# Altium PCB PCB4-SmallVersion.PcbDoc
Units mil, origin at the board's own origin, x right, y up, seen from the top; angles counter-clockwise.
Board outline 2065.03 x 1140.03 mil, 2 copper layers (Top Layer, Bottom Layer); 22 components, 19 nets, 79 pads, 16 vias.
Unrouted connection lines stored in the file: 4.
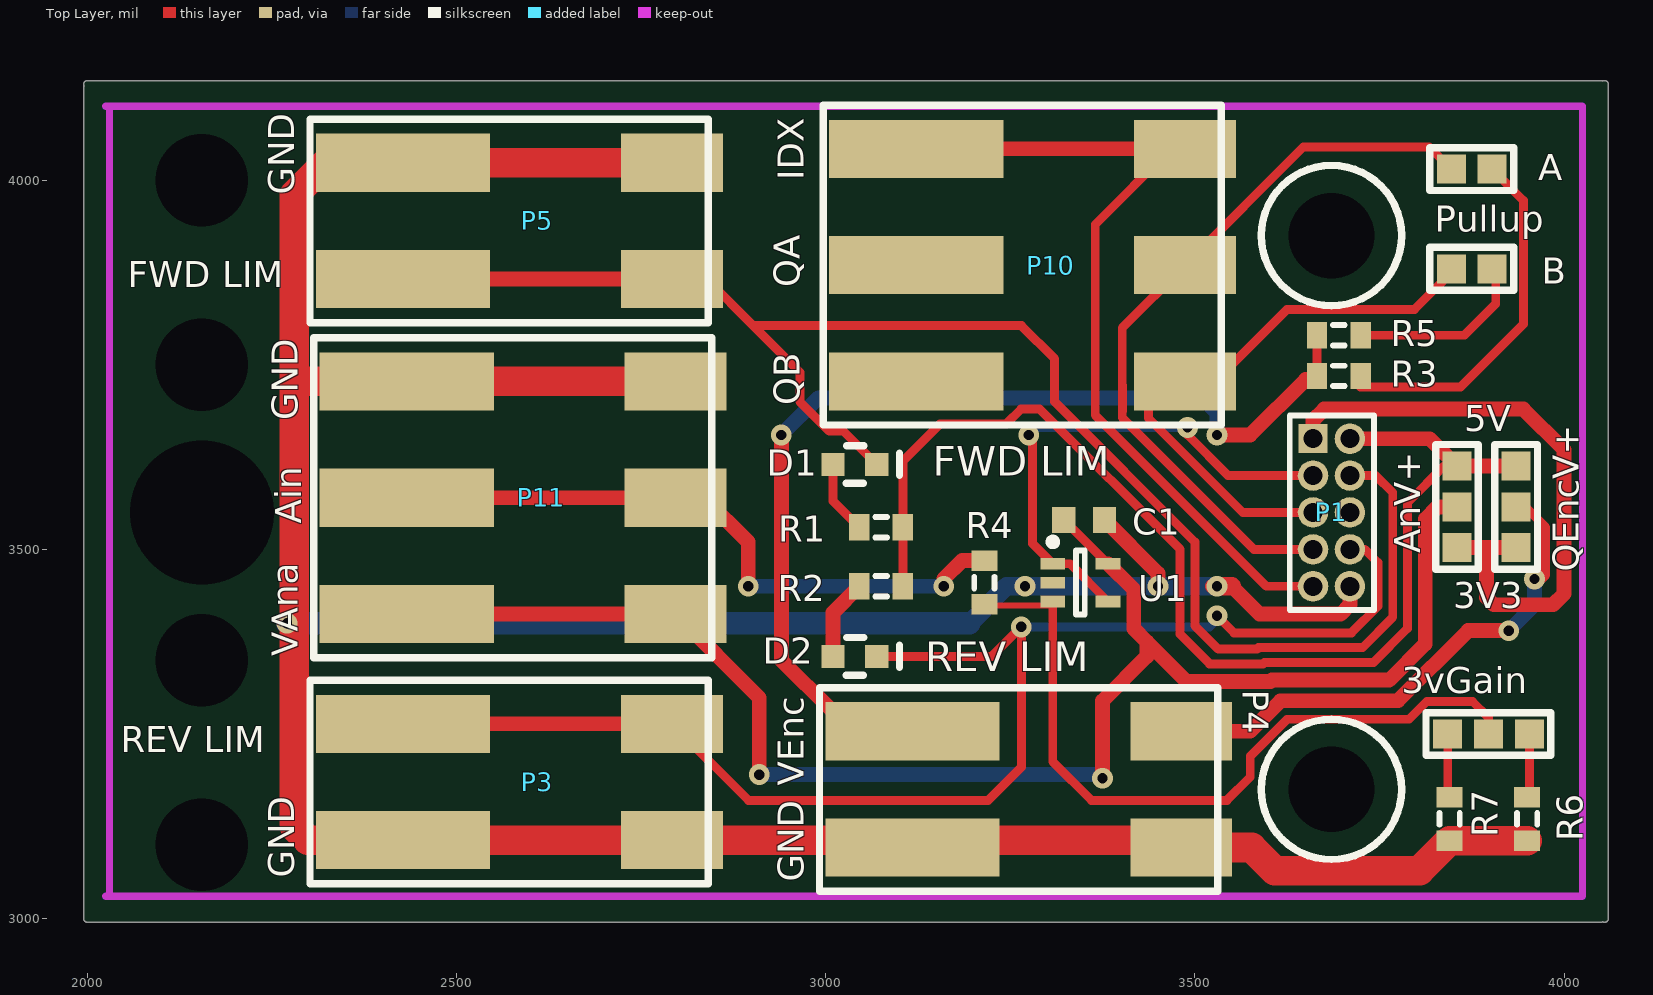
[diagram p0: Top Layer view]
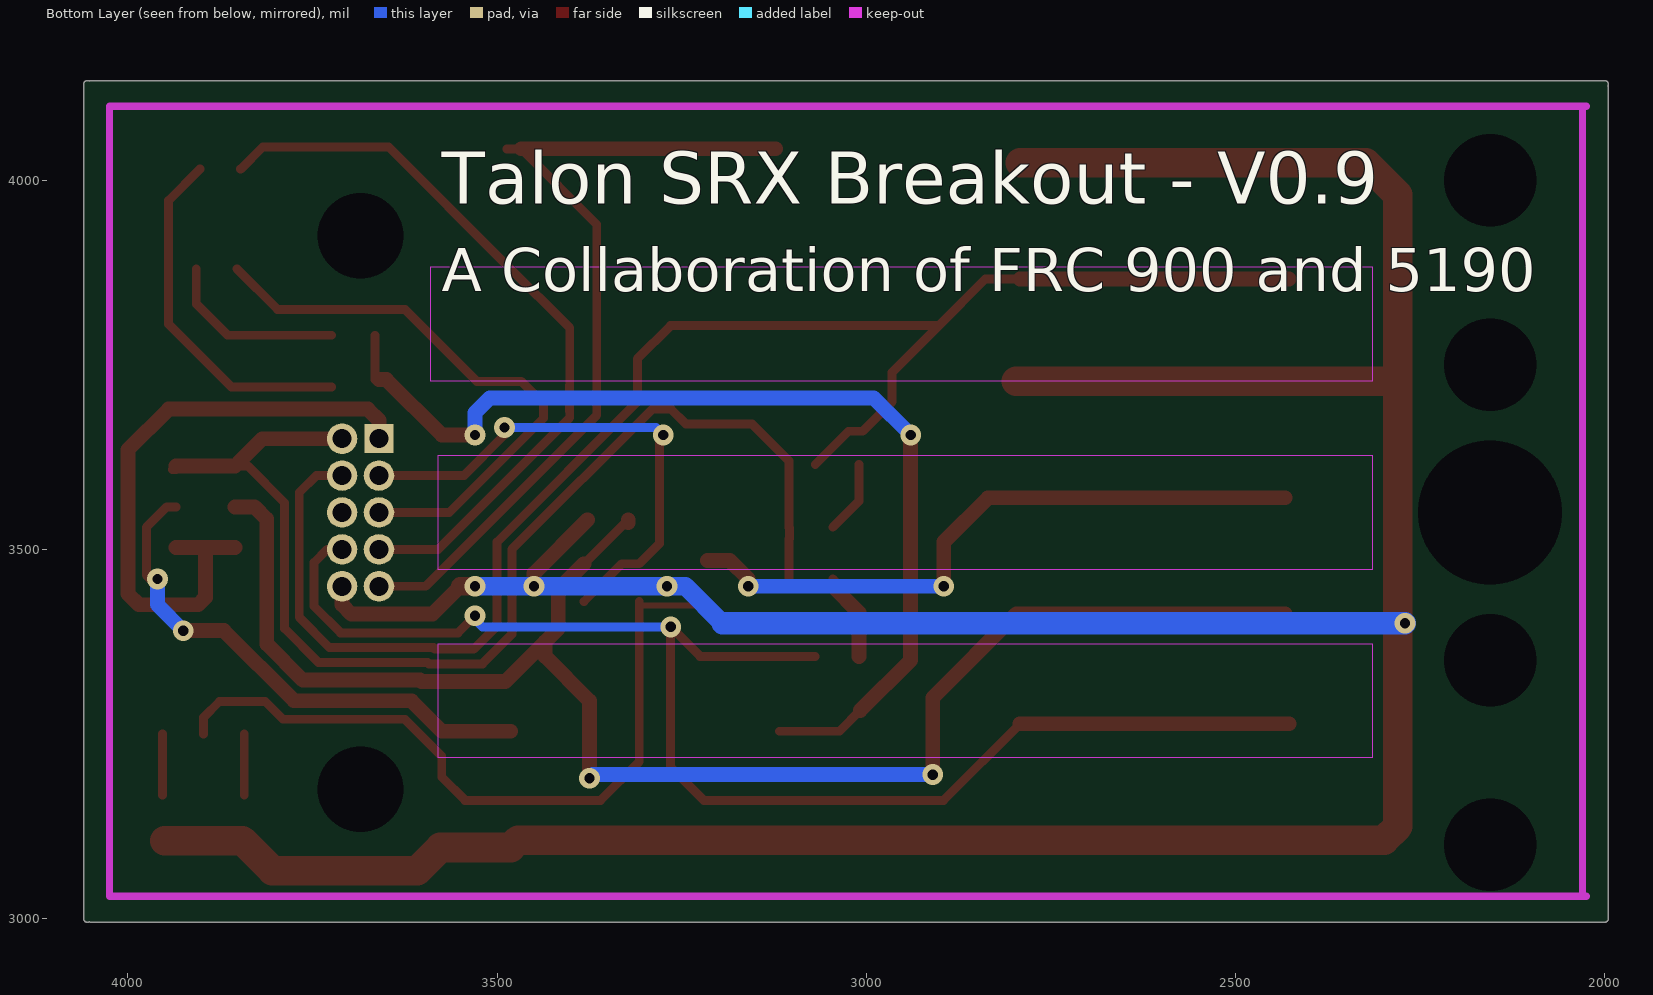
[diagram p1: Bottom Layer view, seen from below]

## Layer stack, top to bottom
Top Solder: solder mask 0.4, Solder Resist, Dk 3.5
Top Layer: signal copper 1.4
Dielectric 1: dielectric 12.6, FR-4, Dk 4.8
Bottom Layer: signal copper 1.4
Bottom Solder: solder mask 0.4, Solder Resist, Dk 3.5

## Board outline
1994.98,3000 1994.98,4125 cw(c2000,4125) 1995.65,4127.5 cw(c2000,4130) 2000,4135.02 4050,4135.02 cw(c4050,4130) 4052.5,4134.35 cw(c4055,4130) 4060.01,4130 4060.01,3000 cw(c4055,3000) 4052.5,2995.65 cw(c4050,3000) 4050,2994.99 2000,2994.99 cw(c2000,3000)

## Design rules (kind name [scope] priority, off if disabled: settings)
Clearance [All] p1: gap=8
PolygonConnect [All] p1: connectstyle=Relief reliefconductorwidth=10 reliefentries=4 polygonreliefangle="90 Angle" airgapwidth=10
RoutingVias [All] p1: holewidth=14 width=28 viastyle="Through Hole" minholewidth=14 minwidth=28 maxholewidth=14 maxwidth=28
SolderMaskExpansion [All] p1: expansion=4
Width Width_1 [InNet('GND')] p1: maxlimit=40 minlimit=10 preferedwidth=20
Width [All] p2: maxlimit=20 minlimit=8 preferedwidth=12
30 further rules are at their usual default settings.

## Components (designator, comment, footprint, x,y, rotation, side; value= is the part's Value field where it differs from the comment)
3vGain "Header 3" "3 Pad Jumper" 3870,3250 r0 top
A "Header 2" "2 Pad Jumper" 3875,4015 r0 top
AnV+ "Header 3" "3 Pad Jumper" 3855,3530 r90 top
B "Header 2" "2 Pad Jumper" 3875,3880 r0 top
C1 "0.1uf" "CAP 0603 (1608)" 3350,3540 r180 top
D1 "LED2" "DIODE 0603/SOD-523F" 3010,3615 r0 top
D2 "LED2" "DIODE 0603/SOD-523F" 3010,3355 r0 top
P1 "Header 5X2" "HDR2X5 - 50Mil" 3660,3650 r0 top
P3 "Header 2" "Wago 2 Pin" 2585,3185 r0 top
P4 "Header 2" "Wago 2 Pin" 3275,3175 r0 top
P5 "Header 2" "Wago 2 Pin" 2585,3945 r0 top
P10 "Header 3" "Wago 3 Pin" 3280,3885 r0 top
P11 "Header 3" "Wago 3 Pin" 2590,3570 r0 top
QEncV+ "Header 3" "3 Pad Jumper" 3935,3530 r90 top
R1 "2k2" "RES 0603 (1608)" 3075,3530 r180 top
R2 "2k2" "RES 0603 (1608)" 3075,3450 r180 top
R3 "10k" "RES 0603 (1608)" 3695,3735 r0 top
R4 "3k3" "RES 0603 (1608)" 3215,3455 r270 top
R5 "10k" "RES 0603 (1608)" 3695,3790 r0 top
R6 "1k7" "RES 0603 (1608)" 3950,3135 r270 top
R7 "100k" "RES 0603 (1608)" 3845,3135 r270 top
U1 "MCP6001T-E/LT" SC70-LT5_N 3345,3455 r0 top

## Footprints (in the part's own frame and the unit in brackets; to place one, negate y for a bottom-side part, rotate by r counter-clockwise, add the part's x,y. Pads: shape width x height; smd on the part's side, far side on the other; paste and mask are expansions set on the pad)
"2 Pad Jumper" [mm] "2 Pad Solder Jumper"
  rect 1x1 smd: 1(-0.7,0) 2(0.7,0)
  silkscreen extent -1.45,-0.74 1.45,0.74
"3 Pad Jumper" [mm] "3 Pad Solder Jumper"
  rect 1x1 smd: 1(-0.7,0) 2(0.7,0) 3(2.108,0)
  silkscreen extent -1.45,-0.74 2.84,0.74
"CAP 0603 (1608)" [mm] "Chip Capacitor, Body 1.6x0.8mm, IPC High Density"
  rect 0.8x0.9 smd: 1(-0.7,0) 2(0.7,0)
  body extent -0.87,-0.48 0.87,0.48, height 1.3
"DIODE 0603/SOD-523F" [mm] "DIODE 0603/SOD-523F"
  rect 0.8x0.8 smd: 1(0,0) 2(1.5,0)
  silkscreen extent 0.45,-0.65 2.29,0.65, body extent -0.12,-0.47 1.63,0.48, height 0.85
"HDR2X5 - 50Mil" [mm] "Connector; Header; 5x2 Position"
  rect 1x1 hole 0.65: 1(0,0)
  round 1.05 hole 0.65: 2(1.27,0) 3(0,-1.27) 4(1.27,-1.27) 5(0,-2.54) 6(1.27,-2.54) 7(0,-3.81) 8(1.27,-3.81) 9(0,-5.08) 10(1.27,-5.08)
  silkscreen extent -0.8,-5.9 2.1,0.8
"RES 0603 (1608)" [mm] "Chip Resistor, Body 1.6x0.8mm, IPC High Density"
  rect 0.7x0.9 smd: 1(-0.75,0) 2(0.75,0)
  silkscreen extent -0.2,-0.35 0.2,0.35, body extent -0.85,-0.48 0.85,0.48, height 0.9
SC70-LT5_N [mm] "SOT353, 5-Leads, Body 2x1.3mm, Pitch 0.65mm, Lead Span 2.1mm, IPC Medium Density"
  rect 0.85x0.4 smd: 1(-0.95,0.65) 2(-0.95,0) 3(-0.95,-0.65) 4(0.95,-0.65) 5(0.95,0.65)
  silkscreen extent -1.07,-1.1 0.15,1.52, body extent -0.7,-1.1 0.7,1.1, height 1.1
"Wago 2 Pin" [mm]
  rect 6x2 smd: 1(-4,2) 2(-4,-2)
  rect 3.5x2 smd: 1(5.25,2) 2(5.25,-2)
  silkscreen extent -7.2,-3.5 6.5,3.5, body extent -7.2,-3.5 6.5,3.5, height 4.5
"Wago 3 Pin" [mm]
  rect 6x2 smd: 1(-4,4) 2(-4,0) 3(-4,-4)
  rect 3.5x2 smd: 1(5.25,4) 2(5.25,0) 3(5.25,-4)
  silkscreen extent -7.2,-5.5 6.5,5.5, body extent -7.2,-5.5 6.5,5.5, height 4.5

## Part data
3vGain AnV+ P10 P11 QEncV+: "Header, 3-Pin"
A B P3 P4 P5: "Header, 2-Pin"
C1: library part "Capacitor Surface Mount", "Capacitor Surface Mount"
D1 D2: "Typical RED, GREEN, YELLOW, AMBER GaAs LED"
P1: "Header, 5-Pin, Dual row"
R1 R2 R3 R4 R5 R6 R7: library part "Resistor Surface Mount", "Resistor Surface Mount"
U1: "1 MHz, Low-Power Operational Amplifier, 5-Pin SC-70, Extended Temperature, Tape and Reel"

## Free pads (board coordinates)
  round 60 hole 195 unplated: 0(2155,3550)
  round 60 hole 116 unplated: 0(3685,3175) 0(3685,3925)
  round 60 hole 125 unplated: 1(2155,4000) 2(2155,3350) 3(2155,3750) 4(2155,3100)

## Via types
v1: diameter 28, hole 14, Top Layer to Bottom Layer, 16 vias

## Nets (pads, with @x,y where several pads share a name; then routed paths per layer and width w, separated by ;. In a path a pad name is that pad's centre, name@x,y a point inside that pad or via, vN(x,y) a via of type N, cw(c..) or ccw(c..) an arc to the next point about the centre after c; other vN are vias at no path point)
3V3: AnV+.1 P1.1 QEncV+.1 | length 851.8
  Top Layer w20: P1.1 3660,3675 3675,3690 3945,3690 4000,3635 4000,3440 3985,3425 3905,3425 3895,3435 3895,3502.44 ; AnV+.1 3895,3502.44 ; QEncV+.1 3895,3502.44
ANALOGIN: P1.3 U1.1 U1.4 | length 712.9
  Top Layer w12: v1(3275,3655) 3280,3650 3280,3508.19 U1.1 3331.22,3480.59 U1.4 ; v1@3485,3660 v1(3490,3665) 3490,3655 3545,3600 P1.3
  Bottom Layer w12: v1(3275,3655) 3285,3665 v1(3490,3665)
ANALOGRAW: P11.2 R4.1 | length 887.7
  Top Layer w20: P11.2@2432.52,3570 2796.69,3570 2835,3570 2895,3510 v1(2895,3450) ; v1(3160,3450) 3160,3460 3185,3485 R4.1@3215,3485
  Bottom Layer w20: v1(2895,3450) v1(3160,3450)
"FORWARD LIMIT": D1.2 P1.4 P5.2 | length 2171.4
  Top Layer w12: P5.2@2791.69,3866.26 2838.74,3866.26 2901.87,3803.13 ; D1.2 3024.06,3660 3005,3660 2965,3700 2965,3740 2901.87,3803.13 ; P1.4 3745,3600 3768,3577 3768,3408 3727,3367 3586.24,3367 3584.24,3365 3531.72,3365 3500,3396.72 3500,3510 3310,3700 3310,3758.13 3265,3803.13 2901.87,3803.13
  Top Layer w20: P5.2@2427.52,3866.26 P5.2@2791.69,3866.26
GND: C1.1 P1.10 P3.2 P4.2 P5.1 P11.1 R6.2 R7.2 U1.2 | length 5245.6
  Top Layer w20: C1.1 3450,3467.56 v1(3450,3450) ; v1@3524,3450 v1(3530,3450) ; 3550,3450 3587.69,3412.31 3697.31,3412.31 3710,3425 P1.10
  Top Layer w25: v1(3530,3450) 3550,3450
  Top Layer w40: P5.1@2791.69,4023.74 2427.52,4023.74 2323.74,4023.74 2280,3980 2280,3727.48 ; P11.1@2796.69,3727.48 2432.52,3727.48 2280,3727.48 ; R6.2 R7.2 3804.53,3065 3608,3065 3576.74,3096.26 3481.69,3096.26 3471.69,3106.26 2791.69,3106.26 2427.52,3106.26 2298.74,3106.26 2280,3125 2280,3497.52 2280.5,3498.02 2280.5,3601.98 2280,3602.48 2280,3727.48
  Bottom Layer w25: 3195,3400 3245,3450 v1(3270,3450) v1(3450,3450) v1(3530,3450)
  Bottom Layer w30: v1(2270.5,3400) 3195,3400
INDEX: P1.9 P10.1 | length 1158.4
  Top Layer w12: P10.1@3486.69,4042.48 3467.48,4042.48 3365,3940 3365,3681.72 3596.72,3450 P1.9
  Top Layer w20: P10.1@3122.52,4042.48 P10.1@3467.48,4042.48
Net3vGain_1: 3vGain.1 R7.1 | length 82.9
  Top Layer w12: R7.1@3842.44,3167.09 3vGain.1
Net3vGain_2: 3vGain.2 R4.2 U1.3 | length 1028.6
  Top Layer w8: R4.2@3224.35,3424 U1.3@3307.6,3424
  Top Layer w12: R4.2 3218.94,3429.41 R4.2@3224.35,3424 ; U1.3 3307.6,3424 3307.6,3212.4 3360,3160 3543.28,3160 3575,3191.72 3575,3220 3625,3270 3790,3270 3814,3294 3876,3294 3897.56,3272.44 3vGain.2
Net3vGain_3: 3vGain.3 R6.1 | length 82.5
  Top Layer w12: R6.1@3953,3167.53 3vGain.3
NetA_2: A.2 R3.2 | length 483.3
  Top Layer w12: R3.2@3724.53,3720 3860,3720 3945,3805 3945,3972.56 A.2
NetB_2: B.2 R5.2 | length 248.1
  Top Layer w12: R5.2 3865,3790 3907.56,3832.56 B.2@3907.56,3880
NetD1_1: D1.1 R1.2 | length 99.7
  Top Layer w12: D1.1 3010,3565.47 R1.2
NetD2_1: D2.1 R2.2 | length 116.8
  Top Layer w12: R2.2@3040.47,3455 R2.2@3045.47,3460
  Top Layer w20: D2.1 3010,3414.53 R2.2
"QUAD A": A.1 P1.7 P10.2 | length 1013.8
  Top Layer w12: P1.7 3580,3500 3401.69,3678.31 3401.69,3687.3 3402,3687.6 3402,3722.4 3401.69,3722.7 3401.69,3800 3486.69,3885 3646.69,4045 3817.44,4045 A.1
"QUAD B": B.1 P1.5 P10.3 | length 786.2
  Top Layer w12: P1.5 3565,3550 3437.09,3677.91 3437.09,3697.09 3467.52,3727.52 3486.69,3727.52 3527.52,3727.52 3625,3825 3797.44,3825 B.1@3852.44,3880
"REVERSE LIMIT": D2.2 P1.8 P3.1 | length 1929.7
  Top Layer w12: P3.1@2791.69,3263.74 2895.43,3160 3220,3160 3265,3205 v1(3265,3395) 3225,3355 D2.2 ; v1(3530,3410) 3553,3387 3712,3387 3748,3423 3748,3482 3730,3500 P1.8
  Top Layer w20: P3.1@2427.52,3263.74 P3.1@2791.69,3263.74
  Bottom Layer w12: v1(3265,3395) 3520,3395 3535,3410 v1(3530,3410)
V5V: AnV+.3 P1.2 QEncV+.3 R1.1 R2.1 | length 1605.7
  Top Layer w12: R2.1@3104.53,3460 3104.53,3514.16 3103.99,3514.7 3103.99,3528.99 R1.1@3104.76,3529.76 ; R1.1 3104.53,3619.53 3155,3670 3244.53,3670 3264.53,3690 3290,3690 3480,3500 3480,3385 3520,3345 3592.52,3345 3594.52,3347 3742,3347 3788,3393 3788,3563 3838,3613 AnV+.3 AnV+.3@3850,3618 ; QEncV+.3@3935,3608 QEncV+.3@3940,3608
  Top Layer w20: P1.2 3818,3650 AnV+.3@3850,3618 ; AnV+.3 QEncV+.3
VANALOGSUPPLY: AnV+.2 C1.2 P11.3 U1.5 | length 2160.7
  Top Layer w12: C1.2 3381.85,3480.59 U1.5
  Top Layer w20: P11.3@2432.52,3412.52 2796.69,3412.52 2910,3299.21 v1(2910,3195) ; C1.2@3322.44,3536.2 C1.2 ; v1(3375,3190) 3375,3295 3435,3355 3435,3375 ; U1.5 3417.13,3445.86 3417.13,3392.87 3435,3375 ; AnV+.2 3828.56,3557.56 3812,3541 3812,3372 3763,3323 3604.46,3323 3602.46,3321 3489,3321 3435,3375
  Bottom Layer w20: v1(2910,3195) 3370,3195 v1(3375,3190)
VENCODER: P4.1 QEncV+.2 R3.1 R5.1 | length 2112.7
  Top Layer w12: P4.1@3008.13,3281.87 3036.26,3253.74 P4.1@3117.52,3253.74 ; R3.1@3660,3730 3665.47,3730 R5.1 ; QEncV+.2 3947.44,3557.56 3975,3530 3975,3465 v1@3965,3455
  Top Layer w20: v1(2940,3655) 2940,3350 P4.1@3008.13,3281.87 ; P4.1@3481.69,3253.74 3574.8,3253.74 3616.06,3295 3775,3295 3870,3390 v1(3925,3390) ; v1(3530,3655) 3575,3655 3650,3730 R3.1@3660,3730
  Bottom Layer w20: v1(2940,3655) 2990,3705 3510,3705 3530,3685 v1(3530,3655) ; v1(3925,3390) 3960,3425 v1(3960,3460)
pads on no net: P1.6

## Keep-outs
Bottom Layer:
  rectangle: 2315,3727.5 3590,3882.5
  rectangle: 2315,3472.5 3580,3627.5
  rectangle: 2315,3217.5 3580,3372.5
Keep-Out Layer:
  lines w10: 2025,3030 4025,3030 4025,3495 4025,4100 2025,4100 ; 2030,3030 2030,4100

## Silkscreen, mask and mechanical layers (free items; w line width, h text height)
Top Overlay:
  circle w10: c3685,3925 r95
  circle w10: c3685,3175 r95
  text "IDX" at 2970,4000 h35 r90
  text "GND" at 2280,3980 h35 r90
  text "Pullup" at 3825,3930 h35
  text "FWD LIM" at 2055,3855 h35
  text "QA" at 2965,3855 h35 r90
  text "QB" at 2965,3695 h35 r90
  text "GND" at 2285,3675 h35 r90
  text "5V" at 3865,3660 h35
  text "FWD LIM" at 3145,3600 h40
  text "Ain" at 2290,3535 h35 r90
  text "3V3" at 3850,3420 h35
  text "VAna" at 2285,3355 h35 r90
  text "REV LIM" at 3135,3335 h40
  text "REV LIM" at 2045,3225 h35
  text "VEnc" at 2970,3180 h35 r90
  text "GND" at 2280,3055 h35 r90
  text "GND" at 2970,3050 h35 r90
Bottom Overlay:
  text "Talon SRX Breakout - V0.9" at 3575,3945 h120
  text "A Collaboration of FRC 900 and 5190" at 3575,3830 h100
Mechanical 3:
  lines w10: 2000,4125 2000,3000 4050,3000 ; 2000,4130 4050,4130 ; 4055,3000 4055,4130
Drill Drawing:
  text ".LEGEND" at 4730,3730 h35
  text "Drill Drawing." at 4720,3565 h35

## Dimensions
2025,4100 to 2030,3030 on Mechanical 1
2020,3000 to 4025,3000 on Mechanical 1